# EAGLE board SD_RNXV_shield (EAGLE 5.11)
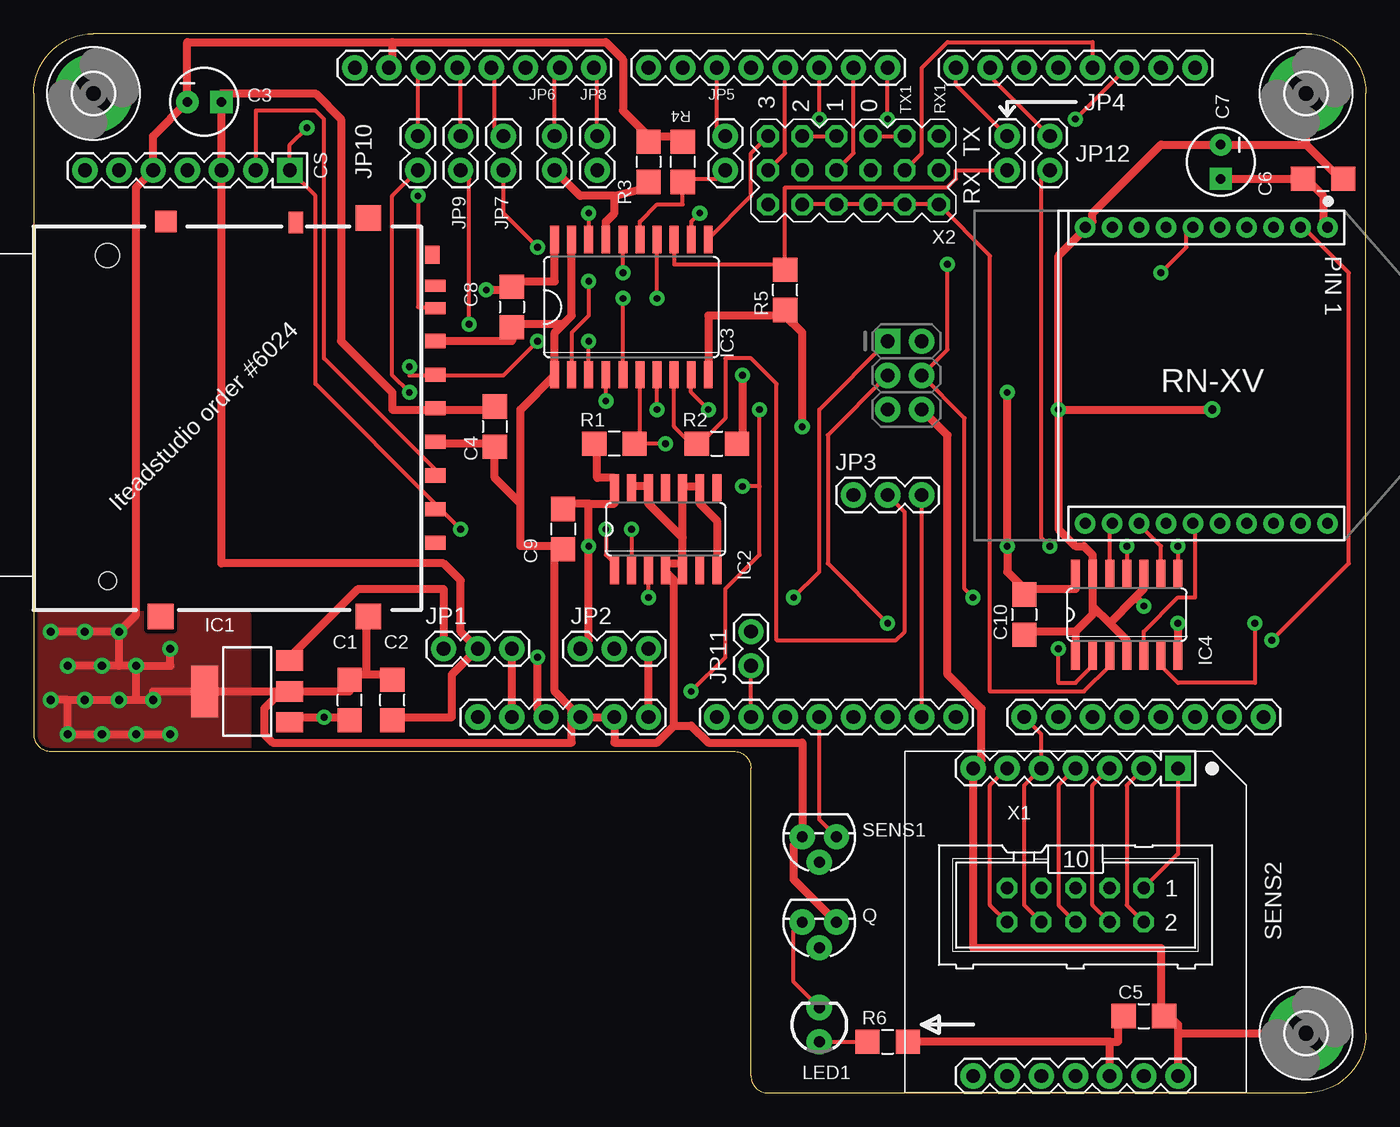
[diagram p0: board, top side]
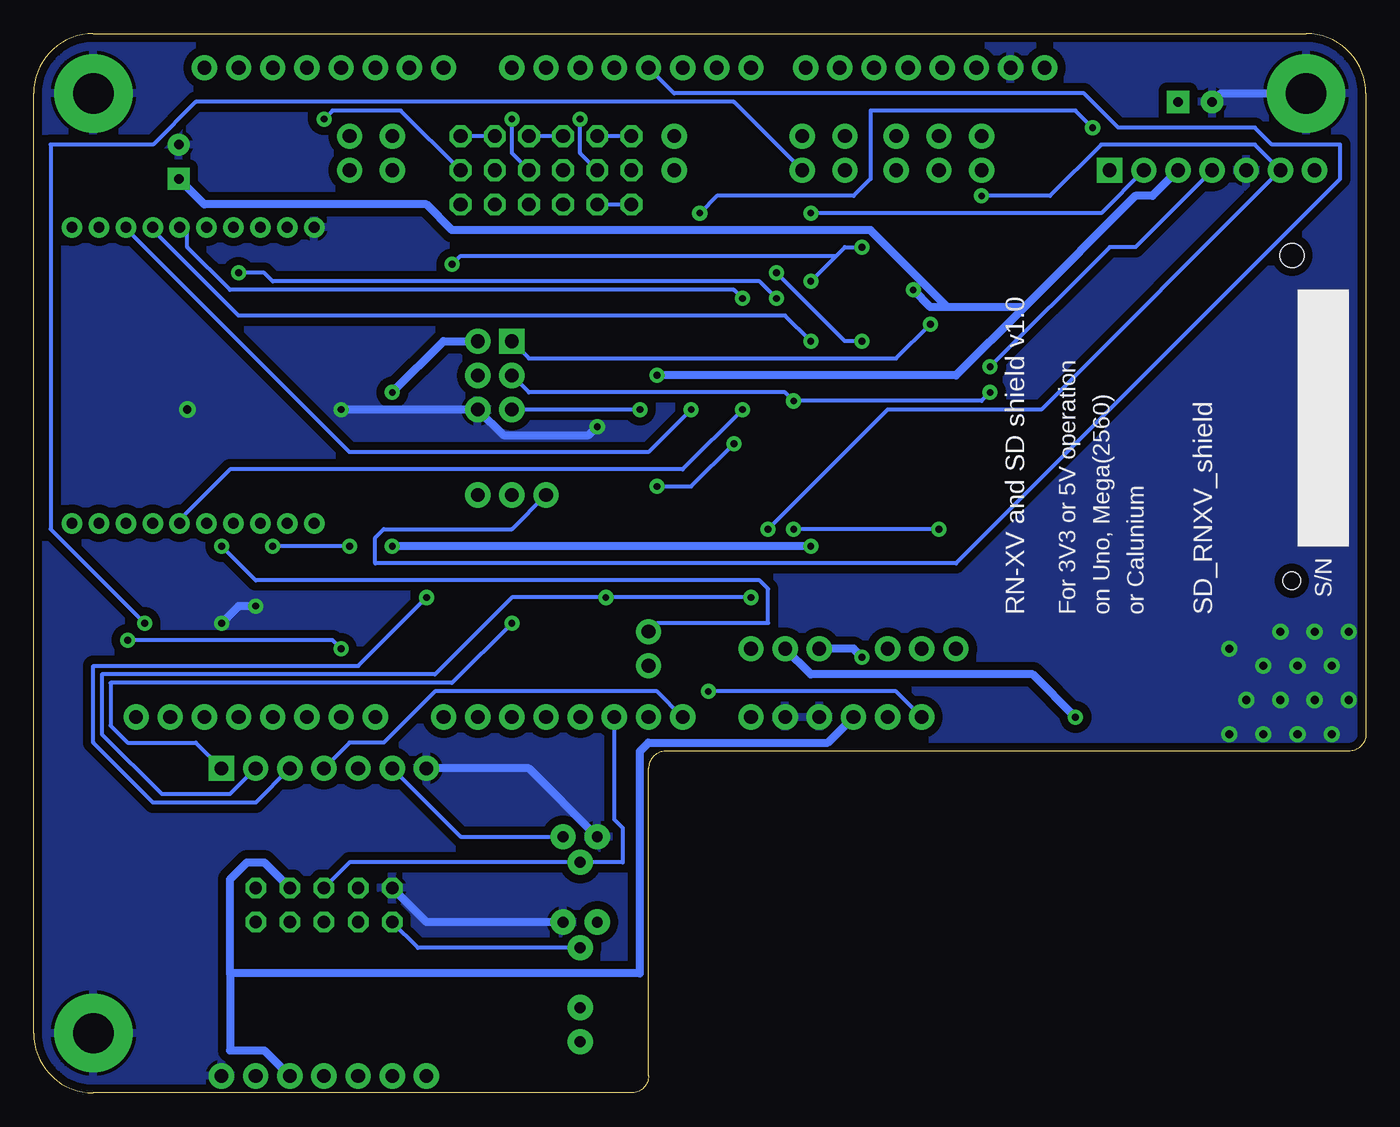
[diagram p1: board, bottom side, seen from below]

Size 99.06 x 78.74 mm. Coordinates in mm from the lower left corner, seen from the top.
Outline: 99.06,4.45 99.06,74.3 arc90 94.61,78.74 4.45,78.74 arc90 0,74.3 0,26.67 arc90 1.27,25.4 52.07,25.4 arc-90 53.34,24.13 53.34,1.27 arc90 54.61,0 94.61,0 arc90 99.06,4.45
Copper layers (1*16): Top 0.035mm / dielectric 1.5mm / Bottom 0.035mm
Design rules "SparkFun_very_conservative": minimum track width 12mil, minimum drill 20mil, track to track 12mil, track to pad 12mil, pad to pad 12mil, via to via 12mil, smd to smd 12mil, copper to edge 10mil, drill to drill 8mil, minimum pad ring 12mil, minimum via ring 12mil, stop-mask expansion 4mil, vias tented up to drill 25mil, thermal gap 10mil
Net classes: 1 power: width 0.61 mm

## Footprints (pad centres in the part's own frame; a part is rotated, then mirrored left to right if it is on the bottom)
1206-HAND = smd 1.8 x 1.803: 1 -1.499,0; 2 1.499,0
CPOL-RADIAL-10UF-25V = drill 0.7 pad 1.651 square: 1 1.27,0 | drill 0.7 pad 1.651 round: 2 -1.27,0
3,0-PAD = drill 3 pad 5.842 round: B3,0 0,0
SOT223 = smd 1.5 x 2: 1 -2.3,-3.15; 2 0,-3.15; 3 2.3,-3.15 | smd 3.8 x 2: 4 0,3.15
SO14 = smd 0.66 x 2.032: 1 -3.81,-3.073; 2 -2.54,-3.073; 3 -1.27,-3.073; 4 0,-3.073; 5 1.27,-3.073; 6 2.54,-3.073; 7 3.81,-3.073; 8 3.81,3.073; 9 2.54,3.073; 10 1.27,3.073; 11 0,3.073; 12 -1.27,3.073; 13 -2.54,3.073; 14 -3.81,3.073
SO20W = smd 0.66 x 2.032: 1 -5.715,-5.029; 2 -4.445,-5.029; 3 -3.175,-5.029; 4 -1.905,-5.029; 5 -0.635,-5.029; 6 0.635,-5.029; 7 1.905,-5.029; 8 3.175,-5.029; 9 4.445,-5.029; 10 5.715,-5.029; 11 5.715,5.029; 12 4.445,5.029; 13 3.175,5.029; 14 1.905,5.029; 15 0.635,5.029; 16 -0.635,5.029; 17 -1.905,5.029; 18 -3.175,5.029; 19 -4.445,5.029; 20 -5.715,5.029
1X03 = drill 1.016 pad 1.88 round: 1 0,0; 2 2.54,0; 3 5.08,0
1X02 = drill 1.016 pad 1.88 round: 1 0,0; 2 2.54,0
LED3MM = drill 0.813 pad 1.88 round: A -1.27,0; K 1.27,0
TO-92 = drill 0.813 pad 1.88 round: 1 -1.27,0; 2 0,1.905; 3 1.27,0
XBEE-SILK = drill 0.8 pad 1.524 round: 1 -11,20; 2 -11,18; 3 -11,16; 4 -11,14; 5 -11,12; 6 -11,10; 7 -11,8; 8 -11,6; 9 -11,4; 10 -11,2; 11 11,2; 12 11,4; 13 11,6; 14 11,8; 15 11,10; 16 11,12; 17 11,14; 18 11,16; 19 11,18; 20 11,20
SPARKFUN-MICROSD-BREAKOUT-NO-NAMES-ON-SILK = drill 1.016 pad 1.88 square: 1 -10.16,7.62 | drill 1.016 pad 1.88 round: 2 -10.16,5.08; 3 -10.16,2.54; 4 -10.16,0; 5 -10.16,-2.54; 6 -10.16,-5.08; 7 -10.16,-7.62
SD-SOCKET-4UCON-19607 = smd 1.35 x 1.1: CD -12.13,29.64 | smd 1.05 x 1.56: CD/DAT3 6.77,29.87; CLK -3.23,29.87; CMD 4.27,29.87; DAT2 9.27,29.87; GND@0 1.77,29.87; GND@1 -5.73,29.87; VDD -0.73,29.87 | smd 1.6 x 1.1: COM -14.55,19.5 | smd 0.9 x 1.56: DAT0 -8.15,29.87; DAT1 -9.85,29.87 | smd 1.9 x 1.9: SHIELD@0 14.75,24.9; SHIELD@1 14.75,9.45; SHIELD@2 -14.87,24.9 | smd 1.6 x 1.6: WP -14.6,9.83 | hole 1.8: -12.1,5.5 | hole 1.3: 12.1,5.5
MICROMAG = drill 1.016 pad 1.88 square: 1 -7.62,-11.43 | drill 1.016 pad 1.88 round: 2 -5.08,-11.43; 3 -2.54,-11.43; 4 0,-11.43; 5 2.54,-11.43; 6 5.08,-11.43; 7 7.62,-11.43; 8 7.62,11.43; 9 5.08,11.43; 10 2.54,11.43; 11 0,11.43; 12 -2.54,11.43; 13 -5.08,11.43; 14 -7.62,11.43
CALUNIUM-SHIELD-NO-OUTLINE-NO-HOLES-NO-NAMES = drill 1.016 pad 1.88 round: 0(RX0) 0,21.59; 1(TX0) -2.54,21.59; 2@0 -5.08,21.59; 2@1 17.78,21.59; 3.3V -27.94,-26.67; 3@0 -7.62,21.59; 3@1 15.24,21.59; 4 -10.16,21.59; 5 -12.7,21.59; 5V@0 -25.4,-26.67; 5V@1 2.54,1.27; 6 -15.24,21.59; 7 -17.78,21.59; 8 -21.844,21.59; 9 -24.384,21.59; 10 -26.924,21.59; 11@0 -29.464,21.59; 11@1 2.54,-1.27; 12@0 -32.004,21.59; 13@0 -34.544,21.59; 13@1 0,-1.27; 14 10.16,-26.67; 15 12.7,-26.67; 16 15.24,-26.67; 17 17.78,-26.67; 18 20.32,-26.67; 19 22.86,-26.67; 20@0 25.4,-26.67; 20@1 20.32,21.59; 21@0 27.94,-26.67; 21@1 22.86,21.59; 22 5.08,21.59; 23 7.62,21.59; !RESET@0 -30.48,-26.67; !RESET@1 0,-3.81; A0 -12.7,-26.67; A1 -10.16,-26.67; A2 -7.62,-26.67; A3 -5.08,-26.67; A4/SDA -2.54,-26.67; A5/SCL 0,-26.67; A6 2.54,-26.67; A7 5.08,-26.67; AREF -39.624,21.59; GND@0 -22.86,-26.67; GND@1 -20.32,-26.67; GND@2 -37.084,21.59; GND@3 2.54,-3.81; NC@0 12.7,21.59; NC@1 10.16,21.59; VIN -17.78,-26.67 | drill 1.016 pad 1.88 square: 12@1 0,1.27
ML10 = drill 0.914 octagon: 1 -5.08,-1.27; 2 -5.08,1.27; 3 -2.54,-1.27; 4 -2.54,1.27; 5 0,-1.27; 6 0,1.27; 7 2.54,-1.27; 8 2.54,1.27; 9 5.08,-1.27; 10 5.08,1.27
PIN_3X6 = drill 1.016 octagon: 1 1.27,-1.27; 2 3.81,-1.27; 3 6.35,-1.27; 4 8.89,-1.27; 5 11.43,-1.27; 6 13.97,-1.27; 7 1.27,-3.81; 8 3.81,-3.81; 9 6.35,-3.81; 10 8.89,-3.81; 11 11.43,-3.81; 12 13.97,-3.81; 13 1.27,-6.35; 14 3.81,-6.35; 15 6.35,-6.35; 16 8.89,-6.35; 17 11.43,-6.35; 18 13.97,-6.35

## Placement (x,y rotation side)
C1  1u  [1206-HAND]  23.5,29.21 90 top
C2  1u  [1206-HAND]  26.67,29.21 90 top
C3  100u  [CPOL-RADIAL-10UF-25V]  12.7,73.66 0 top
C4  100n  [1206-HAND]  34.29,49.53 270 top
C5  100n  [1206-HAND]  82.55,5.71 0 top
C6  1u  [1206-HAND]  95.89,67.94 0 top
C7  100u  [CPOL-RADIAL-10UF-25V]  88.27,69.22 270 top
C8  100n  [1206-HAND]  35.56,58.42 270 top
C9  100n  [1206-HAND]  39.37,41.91 270 top
C10  100n  [1206-HAND]  73.66,35.56 270 top
H1  MOUNT-PAD-ROUND3.0  [3,0-PAD]  94.61,4.45 0 top
H2  MOUNT-PAD-ROUND3.0  [3,0-PAD]  94.61,74.3 0 top
H3  MOUNT-PAD-ROUND3.0  [3,0-PAD]  4.45,74.3 0 top
IC1  TC1262  [SOT223]  15.88,29.84 90 top
IC2  74HCT125  [SO14]  46.99,41.91 0 top
IC3  74HC244DW  [SO20W]  44.45,58.42 0 top
IC4  74HCT125  [SO14]  81.28,35.56 0 top
JP1  VREG/3V3  [1X03]  30.48,33.02 0 top
JP2  +5V/VIN  [1X03]  45.72,33.02 180 top
JP3  SD_CS  [1X03]  60.96,44.45 0 top
JP4  CTS  [1X02]  72.39,71.12 270 top
JP5  GPIO5  [1X02]  51.44,71.12 270 top
JP6  GPIO8  [1X02]  38.73,71.12 270 top
JP7  MOSI  [1X02]  34.92,71.12 270 top
JP8  GPIO6  [1X02]  41.91,68.58 90 top
JP9  MISO  [1X02]  31.75,71.12 270 top
JP10  SCK  [1X02]  28.57,71.12 270 top
JP11  GPIO4  [1X02]  53.34,34.29 270 top
JP12  RTS  [1X02]  75.56,68.58 90 top
LED1  [LED3MM]  58.42,5.08 90 top
Q  2N7000  [TO-92]  58.42,12.7 180 top
R1  100k  [1206-HAND]  43.18,48.26 180 top
R2  100k  [1206-HAND]  50.8,48.26 0 top
R3  100k  [1206-HAND]  45.72,69.22 270 top
R4  100k  [1206-HAND]  48.26,69.22 270 top
R5  100k  [1206-HAND]  55.88,59.69 90 top
R6  1k  [1206-HAND]  63.5,3.81 0 top
RN-XV  [XBEE-SILK]  76.2,53.34 270 top
SD1  SPARKFUN-MICROSD-BREAKOUTNO-SILK  [SPARKFUN-MICROSD-BREAKOUT-NO-NAMES-ON-SILK]  11.43,58.42 270 top
SD2  SD_CARD_SOCKET  [SD-SOCKET-4UCON-19607]  0,50.16 270 top
SENS1  LM61  [TO-92]  58.42,19.05 180 top
SENS2  MICROMAG  [MICROMAG]  77.47,12.7 180 top
U1  CALUNIUM-SHIELD  [CALUNIUM-SHIELD-NO-OUTLINE-NO-HOLES-NO-NAMES]  63.5,54.61 0 top
X1  REMOTE MICROMAG  [ML10]  77.47,13.97 180 top
X2  RX / TX  [PIN_3X6]  68.58,64.77 180 top

## Library data of the parts
C1 C2 C4-C6 C8-C10 IC1 Q R1-R6 RN-XV SD1 SD2 SENS1 SENS2 U1 = SteveMarple
C3 C7 JP1-JP12 LED1 = SparkFun
H1-H3 = holes
IC2-IC4 = 74xx-eu
X1 = con-harting-ml; OC_FARNELL: unknown; OC_NEWARK: unknown
X2 = pinhead_3row

## Nets
0(RX0): U1.0(RX0) X2.9
4: JP3.1 U1.4
5: JP5.1 U1.5
8: JP8.2 U1.8
9: JP6.1 U1.9
11: JP7.1 U1.11@0
12: JP9.1 U1.12@0
13: JP10.1 U1.13@0
14: SENS2.5 U1.14 X1.8
22: JP4.1 U1.22
23: JP12.2 U1.23
!RESET: IC3.6 R1.1 U1.!RESET@0 U1.!RESET@1
!RESET_3V3: IC3.14 RN-XV.5
!SD_SS: IC2.1 IC3.12 SD1.1 SD2.CD/DAT3
+3V3 [power]: C2.1 C3.1 C4.1 C6.1 C7.1 C8.1 IC3.20 JP1.2 R2.2 RN-XV.1 SD1.3 SD2.VDD
A0: SENS2.4 U1.A0 X1.6
A1: JP11.2 U1.A1
A2: SENS1.2 U1.A2 X1.5
A3: Q.2 SENS1.1 SENS2.6 U1.A3 X1.10
A6: JP3.3 U1.A6
CTS: IC3.7 RN-XV.16
GND [power]: C1.2 C2.2 C3.2 C4.2 C5.2 C6.2 C7.2 C8.2 C9.2 C10.2 H1.B3,0 H2.B3,0 H3.B3,0 IC1.2 IC1.4 IC2.4 IC2.5 IC2.7 IC2.9 IC2.10 IC2.12 IC2.13 IC3.1 IC3.10 IC3.19 IC4.1 IC4.4 IC4.7 IC4.10 IC4.13 Q.1 R3.1 R4.1 R5.1 RN-XV.10 SD1.5 SD2.GND@0 SD2.GND@1 SD2.SHIELD@0 SENS1.3 SENS2.7 SENS2.14 U1.GND@0 U1.GND@1 U1.GND@2 U1.GND@3 X1.9
GPIO5: IC3.5 RN-XV.6
GPIO8: IC3.3 RN-XV.4
MISO: IC2.3 JP9.2 SENS2.2 U1.12@1 X1.2
MOSI: IC3.2 JP7.2 SENS2.3 U1.11@1 X1.4
MOSI_3V3: IC3.18 SD1.2 SD2.CMD
N$1: IC3.13 JP4.2 R5.2
N$2 [power]: C1.1 IC1.1 JP2.2
N$3: U1.1(TX0) X2.10
N$4: U1.2@0 X2.11
N$5: IC4.11 JP12.1
N$6: IC4.12 RN-XV.12
N$7: U1.3@0 X2.12
N$8: IC4.2 RN-XV.2
N$9: IC3.8 JP3.2 R2.1
N$10 [power]: JP1.3 U1.3.3V
N$11: IC3.15 JP5.2 R4.2
N$13: IC4.5 RN-XV.15
N$14: IC4.9 RN-XV.13
N$15: IC4.8 JP11.1
N$16: IC4.6 JP8.1
N$17 [power]: IC3.17 JP6.2 R3.2
N$18: LED1.A R6.1
N$19: LED1.K Q.3
N$23: IC2.2 SD1.6 SD2.DAT0
RX: IC4.3 X2.1 X2.2 X2.3 X2.4 X2.5 X2.6
RX1: U1.2@1 X2.7
SCK: IC3.4 JP10.2 SENS2.1 U1.13@1 X1.1
SCK_3V3: IC3.16 SD1.4 SD2.CLK
TX: IC3.11 X2.13 X2.14 X2.15 X2.16 X2.17 X2.18
TX1: U1.3@1 X2.8
TX_3V3: IC3.9 RN-XV.3
VCC [power]: C5.1 C9.1 C10.1 IC2.14 IC4.14 JP2.3 R1.2 R6.2 SENS2.12 U1.5V@0 U1.5V@1 X1.3
VIN [power]: JP2.1 U1.VIN
VREG-OUT [power]: IC1.3 JP1.1

## Tracks (layer width: path | path; a pad name or v marks a point on that pad's centre or on a via)
0(RX0)  (via drill 0.51)
  Top 0.305: v63.5,72.39 U1.0(RX0)
  Bottom 0.305: X2.9 63.5,69.85 v63.5,72.39
4
  Bottom 0.305: JP3.1 63.5,41.91 73.03,41.91 73.66,41.27 73.66,39.37 30.48,39.37 1.91,67.94 1.91,70.48 6.99,70.48 8.26,71.75 18.41,71.75 20.95,74.3 51.44,74.3 U1.4
5
  Top 0.305: JP5.1 50.8,71.75 U1.5
8
  Top 0.305: JP8.2 41.91,76.2 U1.8
9
  Top 0.305: JP6.1 38.73,76.2 U1.9
11
  Top 0.305: JP7.1 34.29,71.75 34.29,76.2 U1.11@0
12
  Top 0.305: JP9.1 31.75,76.2 U1.12@0
13
  Top 0.305: JP10.1 28.57,76.2 U1.13@0
14
  Top 0.305: X1.8 73.66,13.97 73.66,22.86 SENS2.5 74.93,26.67 U1.14
22
  Top 0.305: JP4.1 68.58,74.93 U1.22
23
  Top 0.305: JP12.2 71.12,75.56 U1.23
!RESET  (via drill 0.51)
  Top 0.305: 45.09,48.26 IC3.6 | v48.9,29.84 51.44,32.38 51.44,37.47 53.98,40.01 53.98,45.09 | 53.98,45.09 v53.98,50.8 | 53.98,45.09 v52.7,45.09 | v46.99,48.26 45.09,48.26 | 45.09,48.26 R1.1
  Bottom 0.305: U1.!RESET@0 34.92,29.84 v48.9,29.84 | v53.98,50.8 U1.!RESET@1 | v46.99,48.26 50.16,45.09 v52.7,45.09
!RESET_3V3  (via drill 0.51)
  Top 0.305: v46.35,59.05 IC3.14
  Bottom 0.305: v46.35,59.05 46.99,59.69 84.45,59.69 87.63,62.87 87.63,64.14 RN-XV.5
!SD_SS  (via drill 0.51)
  Top 0.305: v42.55,41.91 42.55,40.01 43.18,39.37 IC2.1 | v31.75,41.91 30.48,43.18 SD2.CD/DAT3 29.84,43.81 20.95,52.7 20.95,66.67 SD1.1 19.05,70.48 v20.32,71.75 | v49.53,65.41 48.9,64.77 IC3.12
  Bottom 0.305: v31.75,41.91 v42.55,41.91 | v49.53,65.41 48.26,66.67 38.1,66.67 36.83,67.94 36.83,73.03 21.59,73.03 v20.32,71.75
+3V3  (via drill 0.51)
  Top 0.61: C4.1 34.29,50.8 30.48,50.8 SD2.VDD 29.84,50.8 26.67,50.8 26.67,52.07 22.86,55.88 22.86,72.39 20.95,74.3 13.97,74.3 C3.1 SD1.3 13.97,39.37 30.48,39.37 31.75,38.1 31.75,34.29 JP1.2 31.11,31.11 31.11,27.94 26.67,27.94 C2.1 | RN-XV.1 95.89,64.77 95.89,66.67 94.61,67.94 C6.1 C7.1 | IC3.20 38.73,60.33 35.56,60.33 C8.1 35.56,59.69 v33.66,59.69 | v52.7,53.34 52.7,48.26 R2.2
  Bottom 0.61: v52.7,53.34 30.48,53.34 25.4,58.42 | 25.4,58.42 17.14,66.67 15.88,66.67 SD1.3 | v33.66,59.69 32.38,58.42 31.11,58.42 | 25.4,58.42 31.11,58.42 | C7.1 86.36,66.04 69.85,66.04 67.94,64.14 36.83,64.14 31.11,58.42
A0
  Top 0.305: X1.6 76.2,13.97 76.2,22.86 SENS2.4
  Bottom 0.305: U1.A0 52.7,29.84 69.22,29.84 73.03,26.04 75.56,26.04 SENS2.4
A1
  Top 0.305: U1.A1 JP11.2
A2
  Bottom 0.305: X1.5 75.56,17.14 SENS1.2 55.24,17.14 55.24,19.68 55.88,20.32 U1.A2
A3
  Top 0.305: SENS1.1 58.42,20.32 U1.A3 | X1.10 71.12,13.97 71.12,22.86 SENS2.6
  Bottom 0.305: X1.10 70.48,10.79 Q.2 | SENS2.6 67.31,19.05 SENS1.1
A6
  Top 0.305: U1.A6 JP3.3
CTS  (via drill 0.51)
  Top 0.305: v46.35,50.8 IC3.7
  Bottom 0.305: v46.35,50.8 50.8,46.35 84.45,46.35 88.27,42.55 RN-XV.16
GND  (via drill 0.51, 0.6)
  Top 0.61: 24.77,31.11 26.67,31.11 C2.2 | 24.77,31.11 23.5,31.11 C1.2 23.5,29.84 IC1.2 18.41,29.84 | 24.77,31.11 24.77,34.92 SD2.SHIELD@0 | v1.27,34.29 v3.81,34.29 v6.35,34.29 | v2.54,31.75 v5.08,31.75 6.35,31.75 | v7.62,31.75 6.35,31.75 | 6.35,31.75 v6.35,34.29 | 2.54,29.21 v3.81,29.21 v6.35,29.21 7.62,29.21 | 2.54,29.21 v1.27,29.21 | 2.54,29.21 v2.54,26.67 v5.08,26.67 v7.62,26.67 v10.16,26.67 | 7.62,29.21 v8.89,29.21 8.89,29.84 IC1.4 18.41,29.84 | 7.62,29.21 v7.62,31.75 | 45.72,71.12 48.26,71.12 R4.1 | 45.72,71.12 43.81,73.03 43.81,76.83 42.55,78.11 26.67,78.11 | 26.67,78.11 26.67,76.2 U1.GND@2 | 45.72,71.12 R3.1 | 26.67,78.11 11.43,78.11 C3.2 8.89,71.12 SD1.5 7.62,67.31 7.62,35.56 v6.35,34.29 | 94.61,70.48 97.16,67.94 C6.2 | 94.61,70.48 H2.B3,0 | 77.47,34.29 73.66,34.29 C10.2 | 77.47,34.29 IC4.1 | 78.74,36.2 78.74,35.56 77.47,34.29 | 78.74,36.2 IC4.13 78.74,40.01 78.11,40.64 77.47,40.64 76.2,41.91 v76.2,50.8 | 78.74,36.2 80.01,34.92 | 80.01,34.92 81.28,33.66 IC4.4 | 80.01,34.92 81.92,36.83 | 81.92,36.83 82.55,37.47 IC4.10 | 81.92,36.83 v82.55,36.2 | v85.09,34.92 IC4.7 | v76.2,50.8 76.2,62.23 78.11,64.14 RN-XV.10 78.74,64.77 78.74,65.41 83.82,70.48 C7.2 94.61,70.48 | IC2.13 44.45,45.09 45.72,45.09 IC2.12 45.72,43.81 48.26,41.27 | 48.26,39.37 46.99,39.37 IC2.4 46.99,38.73 47.62,38.1 47.62,27.3 | IC2.7 50.8,42.55 49.53,43.81 IC2.9 49.53,45.09 48.26,45.09 IC2.10 48.26,41.27 | 48.26,39.37 48.26,41.27 | 48.26,39.37 IC2.5 | SD2.GND@1 30.48,55.88 35.56,55.88 C8.2 35.56,57.15 39.37,57.15 | SD2.GND@0 30.48,48.26 34.29,48.26 C4.2 34.29,45.72 36.2,43.81 | 38.73,40.64 36.2,40.64 36.2,43.81 | 38.73,40.64 39.37,40.64 C9.2 38.73,40.64
  Top 0.61: 36.2,43.81 36.2,50.8 38.73,53.34 IC3.1 38.73,56.52 39.37,57.15 | 39.37,57.15 40.01,57.78 IC3.19 | 40.01,28.57 38.73,29.84 38.73,40.64 | 47.62,27.3 46.35,26.04 43.18,26.04 U1.GND@1 U1.GND@0 40.01,28.57 | 85.09,4.45 SENS2.14 | 85.09,4.45 85.09,5.08 84.45,5.71 C5.2 83.82,5.71 83.82,10.79 69.85,10.79 SENS2.7 70.48,24.77 70.48,28.57 67.94,31.11 67.94,48.9 U1.GND@3 | 85.09,4.45 H1.B3,0 | 55.88,57.78 50.16,57.78 IC3.10 | 55.88,57.78 57.15,56.52 v57.15,49.53 | 55.88,57.78 R5.1 | Q.1 56.52,15.88 56.52,18.41 SENS1.3 57.15,26.04 50.16,26.04 48.9,27.3 47.62,27.3 | 18.41,29.84 17.14,28.57 17.14,26.67 17.78,26.04 40.01,26.04 40.01,28.57 | v76.2,50.8 v87.63,50.8 | v7.62,31.75 10.16,31.75 v10.16,33.02
  Bottom 0.61: C3.2 10.79,74.3 H3.B3,0 | v85.09,34.92 83.82,36.2 v82.55,36.2 | X1.9 69.85,12.7 Q.1 | SENS1.3 62.23,24.13 SENS2.7 | v57.15,49.53 57.78,48.9 64.14,48.9 U1.GND@3 v76.2,50.8
  pour Bottom (isolate 0.61): -12.7,88.9 114.3,88.9 114.3,-12.7 -12.7,-12.7
  pour Top: -1.27,35.56 15.88,35.56 15.88,24.13 -1.27,24.13
GPIO5  (via drill 0.51)
  Top 0.305: v83.82,60.96 85.72,62.87 85.72,64.14 RN-XV.6 | IC3.5 v43.81,59.05
  Bottom 0.305: v43.81,59.05 45.09,60.33 81.28,60.33 81.92,60.96 v83.82,60.96
GPIO8  (via drill 0.51)
  Top 0.305: IC3.3 v41.27,55.88
  Bottom 0.305: v41.27,55.88 43.18,57.78 83.82,57.78 90.17,64.14 RN-XV.4
MISO  (via drill 0.51)
  Top 0.305: X1.2 81.28,13.97 81.28,22.86 SENS2.2 | v56.52,36.83 58.42,38.73 58.42,50.8 U1.12@1 | v45.72,36.83 IC2.3 | JP9.2 32.38,67.94 v32.38,57.15
  Bottom 0.305: v45.72,36.83 v56.52,36.83 63.5,36.83 69.22,31.11 93.98,31.11 93.98,26.67 89.53,22.23 84.45,22.23 SENS2.2 | v32.38,57.15 34.92,54.61 62.23,54.61 U1.12@1
MOSI  (via drill 0.51)
  Top 0.305: X1.4 78.74,13.97 78.74,22.86 SENS2.3 | v41.27,60.33 41.27,57.78 40.01,56.52 IC3.2 | v37.47,62.87 34.92,65.41 JP7.2 | v67.94,61.59 67.94,55.24 U1.11@1 69.22,50.16 69.22,37.47 v69.85,36.83
  Bottom 0.305: 39.37,62.23 38.73,62.87 v37.47,62.87 | 39.37,62.23 v41.27,60.33 | v67.94,61.59 67.31,62.23 39.37,62.23 | SENS2.3 82.55,21.59 90.17,21.59 94.61,26.04 94.61,31.75 74.93,31.75 v69.85,36.83
MOSI_3V3  (via drill 0.51)
  Top 0.305: SD1.2 16.51,73.03 20.95,73.03 21.59,72.39 21.59,54.61 29.84,46.35 SD2.CMD | v41.27,65.41 IC3.18
  Bottom 0.305: v41.27,65.41 19.68,65.41 SD1.2
N$1
  Top 0.305: 55.88,61.59 47.62,61.59 IC3.13 | JP4.2 68.58,68.58 68.58,67.94 67.94,67.31 55.88,67.31 55.88,61.59 | 55.88,61.59 R5.2
N$2  (via drill 0.51)
  Top 0.61: C1.1 23.5,27.94 v21.59,27.94 19.05,27.94 IC1.1
  Bottom 0.61: v21.59,27.94 24.77,31.11 41.27,31.11 JP2.2
N$3
  Top 0.305: X2.10 60.96,69.85 U1.1(TX0)
N$4  (via drill 0.51)
  Top 0.305: v58.42,72.39 U1.2@0
  Bottom 0.305: X2.11 58.42,69.85 v58.42,72.39
N$5  (via drill 0.51)
  Top 0.305: v75.56,40.64 74.93,41.27 74.93,67.94 JP12.1 | v81.28,40.64 IC4.11
  Bottom 0.305: v75.56,40.64 v81.28,40.64
N$6
  Top 0.305: IC4.12 80.01,41.91 RN-XV.12
N$7
  Top 0.305: X2.12 55.88,69.85 U1.3@0
N$8  (via drill 0.51)
  Top 0.305: v76.2,33.02 76.2,30.48 77.47,30.48 78.74,31.75 IC4.2 | v92.08,33.66 97.79,39.37 97.79,60.96 94.61,64.14 RN-XV.2
  Bottom 0.305: v76.2,33.02 76.83,33.66 v92.08,33.66
N$9
  Top 0.305: IC3.8 47.62,49.53 48.9,48.26 R2.1 49.53,48.26 51.44,50.16 51.44,54.61 53.34,54.61 55.24,52.7 55.24,33.66 64.14,33.66 64.77,34.29 64.77,43.18 JP3.2
N$10
  Top 0.61: U1.3.3V JP1.3
N$11
  Top 0.305: JP5.2 51.44,67.94 48.26,67.94 R4.2 48.26,66.04 46.35,66.04 45.09,64.77 IC3.15
N$13
  Top 0.305: IC4.5 82.55,34.29 85.09,36.83 86.36,36.83 86.36,41.91 RN-XV.15
N$14
  Top 0.305: IC4.9 83.82,40.64 82.55,41.91 RN-XV.13
N$15  (via drill 0.51)
  Top 0.305: v85.09,40.64 IC4.8
  Bottom 0.305: v85.09,40.64 82.55,38.1 45.09,38.1 44.45,37.47 44.45,34.92 52.7,34.92 JP11.1
N$16  (via drill 0.51)
  Top 0.305: v90.81,34.92 90.81,30.48 85.09,30.48 83.82,31.75 IC4.6
  Bottom 0.305: v90.81,34.92 97.79,41.91 97.79,70.48 90.17,70.48 87,73.66 46.99,73.66 JP8.1
N$17
  Top 0.61: 43.18,66.67 43.18,65.41 42.55,64.77 IC3.17 | 43.18,66.67 45.72,67.31 R3.2 | JP6.2 40.64,66.67 43.18,66.67
N$18
  Top 0.305: LED1.A R6.1
N$19
  Top 0.305: LED1.K 56.52,8.26 56.52,12.06 Q.3
N$23  (via drill 0.51)
  Top 0.305: v28.57,66.67 28.57,58.42 29.84,58.42 SD2.DAT0 | v44.45,41.91 IC2.2
  Bottom 0.305: v28.57,66.67 23.5,66.67 19.68,70.48 8.26,70.48 SD1.6 24.13,50.8 35.56,50.8 v44.45,41.91
RX
  Top 0.305: X2.5 X2.4 X2.3 X2.2 X2.1 71.12,62.23 71.12,29.84 78.11,29.84 80.01,31.75 IC4.3
  Bottom 0.305: X2.5 X2.6
RX1  (via drill 0.51)
  Top 0.305: v77.47,72.39 U1.2@1
  Bottom 0.305: X2.7 71.75,73.03 76.83,73.03 v77.47,72.39
SCK  (via drill 0.51)
  Top 0.305: X1.1 85.09,17.78 SENS2.1 | v42.55,51.44 IC3.4 | JP10.2 26.67,66.67 26.67,53.34 v27.94,52.07 | v63.5,34.92 59.05,39.37 59.05,48.9 U1.13@1
  Bottom 0.305: U1.13@1 62.23,52.07 43.18,52.07 v42.55,51.44 28.57,51.44 v27.94,52.07 | SENS2.1 87,26.04 92.08,26.04 93.34,27.3 93.34,30.48 67.94,30.48 v63.5,34.92
SCK_3V3  (via drill 0.51)
  Top 0.305: v27.94,53.98 27.94,53.34 29.84,53.34 SD2.CLK 30.48,53.34 34.92,53.34 v37.47,55.88 | v43.81,60.96 IC3.16
  Bottom 0.305: v27.94,53.98 19.05,62.87 17.14,62.87 SD1.4 | v43.81,60.96 38.73,55.88 v37.47,55.88
TX
  Top 0.305: X2.15 X2.14 | X2.17 X2.16 | X2.18 53.34,69.85 53.34,66.67 50.16,63.5 IC3.11
  Bottom 0.305: X2.14 X2.13 | X2.18 X2.17 | X2.16 X2.15
TX1
  Top 0.305: X2.8 66.04,69.85 66.04,76.2 67.94,78.11 78.74,78.11 U1.3@1
TX_3V3  (via drill 0.51)
  Top 0.305: v50.16,50.8 48.9,52.07 IC3.9
  Bottom 0.305: v50.16,50.8 53.34,47.62 75.56,47.62 92.08,64.14 RN-XV.3
VCC  (via drill 0.51)
  Top 0.61: 73.66,37.47 77.47,37.47 IC4.14 | 73.66,37.47 72.39,38.73 v72.39,40.64 v72.39,52.07 | 73.66,37.47 C10.1 | 41.27,43.81 43.18,43.81 IC2.14 43.18,45.72 41.91,45.72 41.91,48.26 R1.2 | 41.27,43.81 39.37,43.81 C9.1 | U1.5V@0 37.47,28.57 v37.47,32.38 | 41.27,43.81 v41.27,40.64 41.27,33.66 JP2.3 | 80.01,3.81 80.64,3.81 80.64,5.71 C5.1 | 80.01,3.81 R6.2 | SENS2.12 80.01,3.81
  Bottom 0.61: v72.39,52.07 68.58,55.88 U1.5V@1 | v37.47,32.38 38.1,33.02 JP2.3 | X1.3 81.92,17.14 83.19,17.14 84.45,15.88 84.45,8.89 | 84.45,8.89 84.45,3.17 81.92,3.17 SENS2.12 | U1.5V@0 40.01,26.04 53.34,26.04 53.98,25.4 53.98,8.89 84.45,8.89 | v41.27,40.64 v72.39,40.64
VIN
  Top 0.61: U1.VIN JP2.1
VREG-OUT
  Top 0.61: JP1.1 30.48,37.47 24.13,37.47 19.05,32.38 IC1.3

## Text on the board
tNames: 3 | 2 | 1 | 0 | TX1 | RX1 | TX | CS | RX | PIN 1 | Iteadstudio order #6024
bNames: S/N | or Calunium | on Uno, Mega(2560) | For 3V3 or 5V operation | RN-XV and SD shield v1.0